# EAGLE board farmBot PCB3 v23 (EAGLE 9.7.0)
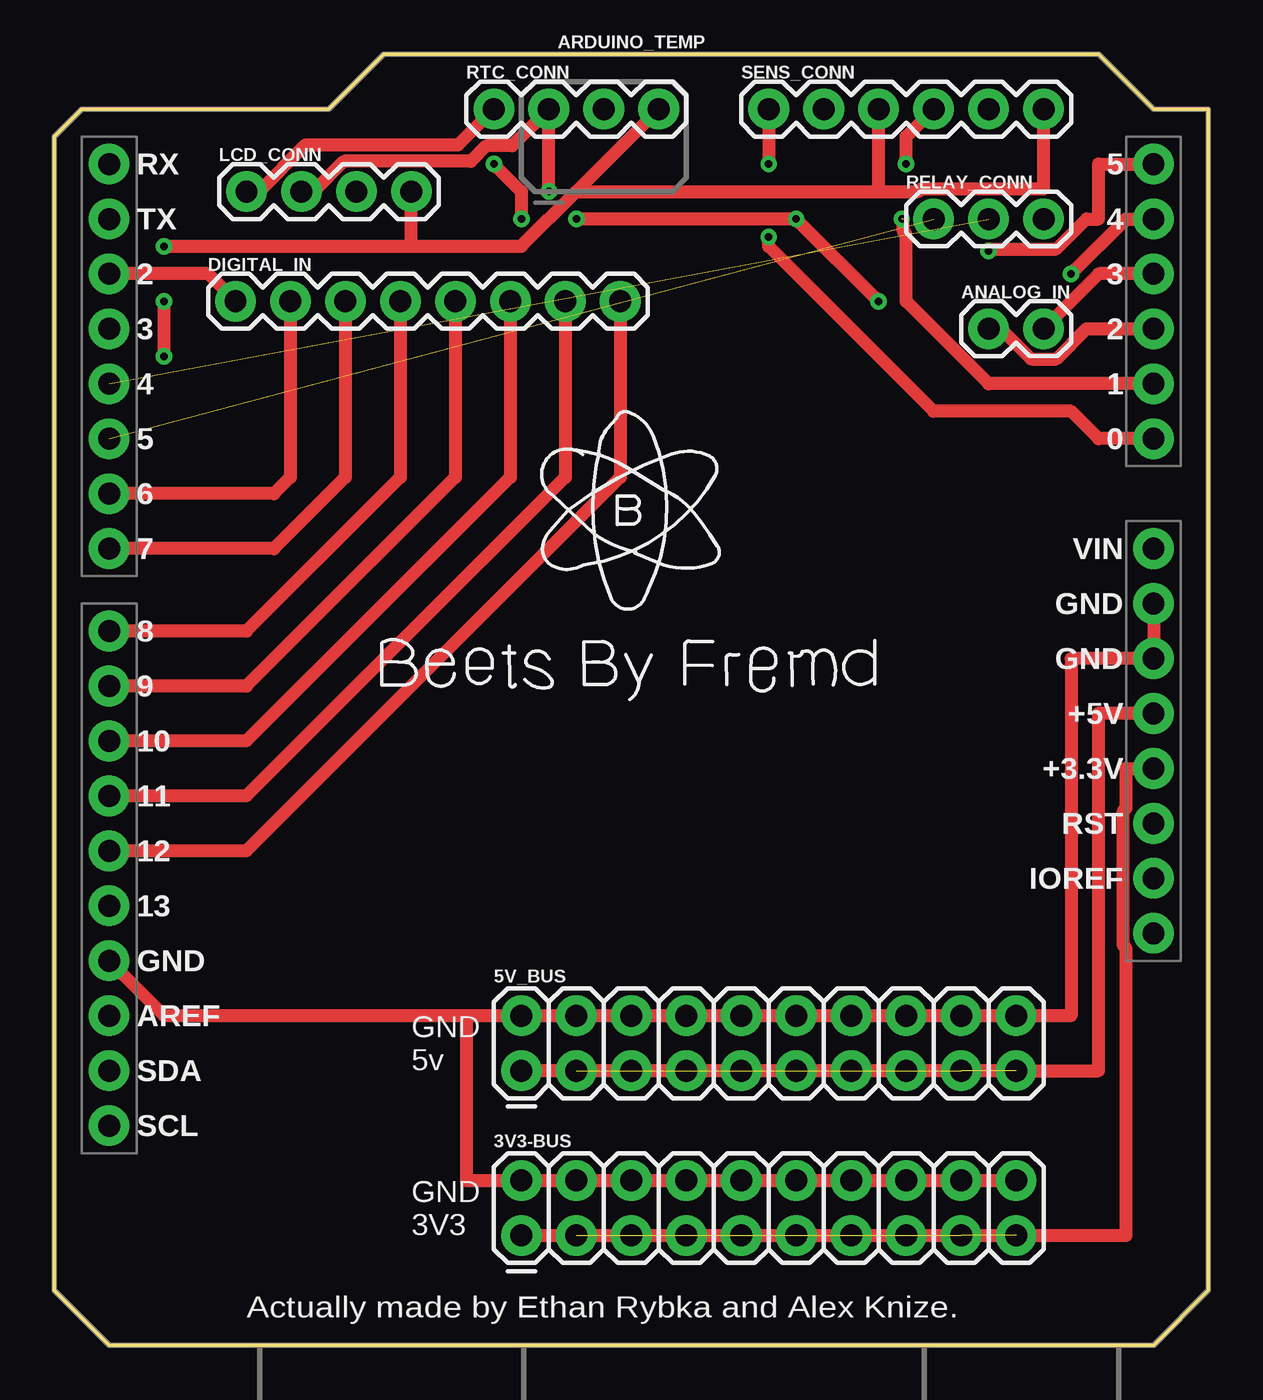
[diagram p0: board, top side]
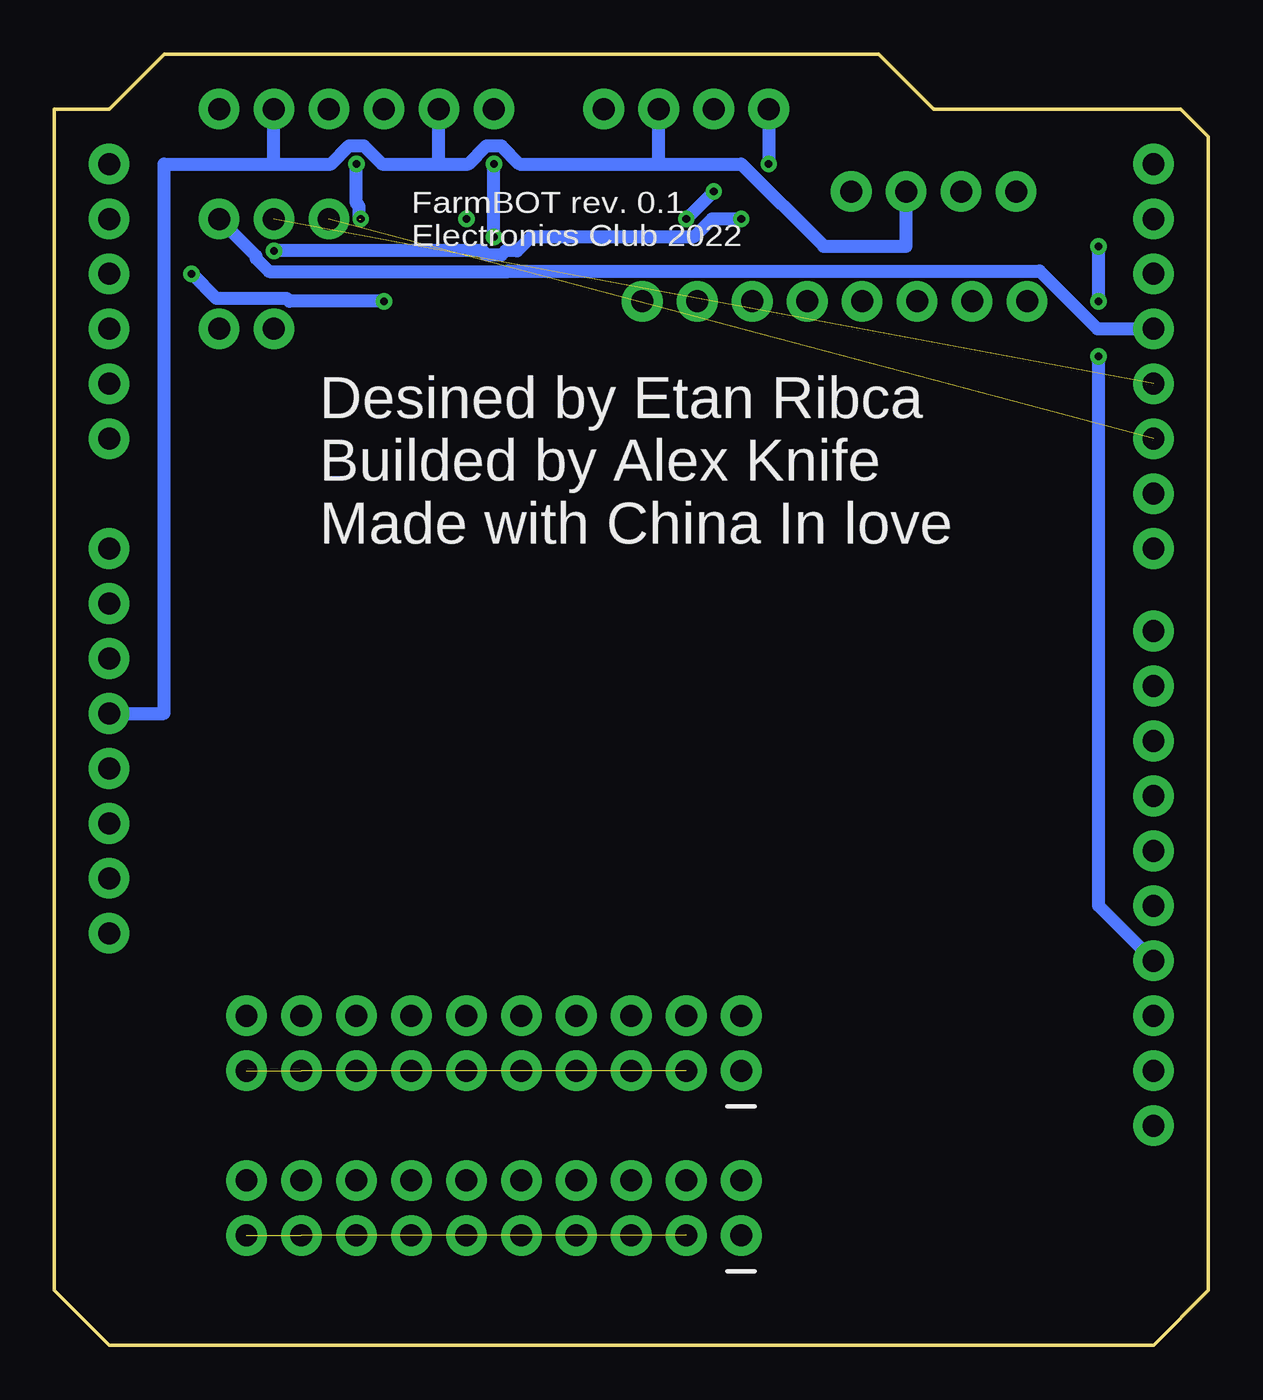
[diagram p1: board, bottom side, seen from below]

Size 53.34 x 59.69 mm. Coordinates in mm from the lower left corner, seen from the top.
Outline: 1.27,57.15 12.7,57.15 15.24,59.69 48.26,59.69 50.8,57.15 53.34,57.15 53.34,2.54 50.8,0 2.54,0 0,2.54 0,55.88 1.27,57.15
Copper layers (1*16): Top 0.035mm / dielectric 1.5mm / Bottom 0.035mm
Design rules "default": minimum track width 6mil, minimum drill 0.35mm, track to track 6mil, track to pad 6mil, pad to pad 6mil, via to via 6mil, smd to smd 6mil, copper to edge 40mil, drill to drill 6mil, minimum pad ring 10mil, minimum via ring 8mil, stop-mask expansion 4mil, vias tented up to drill 0mil, thermal gap 10mil

## Footprints (pad centres in the part's own frame; a part is rotated, then mirrored left to right if it is on the bottom)
2X10 = drill 1.016 pad 1.88: 1 0,0; 2 0,2.54; 3 2.54,0; 4 2.54,2.54; 5 5.08,0; 6 5.08,2.54; 7 7.62,0; 8 7.62,2.54; 9 10.16,0; 10 10.16,2.54; 11 12.7,0; 12 12.7,2.54; 13 15.24,0; 14 15.24,2.54; 15 17.78,0; 16 17.78,2.54; 17 20.32,0; 18 20.32,2.54; 19 22.86,0; 20 22.86,2.54
1X02 = drill 1.016 pad 1.88: 1 0,0; 2 2.54,0
UNO_R3_SHIELD = drill 1.016 pad 1.88: 3.3V 24.13,-2.54; 5V 24.13,0; A0 24.13,12.7; A1 24.13,15.24; A2 24.13,17.78; A3 24.13,20.32; A4 24.13,22.86; A5 24.13,25.4; AREF -24.13,-13.97; D2 -24.13,20.32; D3 -24.13,17.78; D4 -24.13,15.24; D5 -24.13,12.7; D6 -24.13,10.16; D7 -24.13,7.62; D8 -24.13,3.81; D9 -24.13,1.27; D10 -24.13,-1.27; D11 -24.13,-3.81; D12 -24.13,-6.35; D13 -24.13,-8.89; GND@0 24.13,2.54; GND@1 24.13,5.08; GND@2 -24.13,-11.43; IOREF 24.13,-7.62; NC 24.13,-10.16; RES 24.13,-5.08; RX -24.13,25.4; SCL -24.13,-19.05; SDA -24.13,-16.51; TX -24.13,22.86; VIN 24.13,7.62
1X08 = drill 1.016 pad 1.88: 1 0,0; 2 2.54,0; 3 5.08,0; 4 7.62,0; 5 10.16,0; 6 12.7,0; 7 15.24,0; 8 17.78,0
1X04 = drill 1.016 pad 1.88: 1 0,0; 2 2.54,0; 3 5.08,0; 4 7.62,0
1X03 = drill 1.016 pad 1.88: 1 0,0; 2 2.54,0; 3 5.08,0
1X06 = drill 1.016 pad 1.88: 1 0,0; 2 2.54,0; 3 5.08,0; 4 7.62,0; 5 10.16,0; 6 12.7,0

## Placement (x,y rotation side)
3V3-BUS  [2X10]  21.59,5.08 0 top
5V_BUS  [2X10]  21.59,12.7 0 top
ANALOG_IN  A2 A3  [1X02]  43.18,46.99 0 top
ARDUINO_TEMP  ARDUINO_UNO_R3_SHIELDBASIC  [UNO_R3_SHIELD]  26.67,29.21 0 top
DIGITAL_IN  2 6-12  [1X08]  8.38,48.26 0 top
LCD_CONN  SDL SDA 5V GND  [1X04]  8.89,53.34 0 top
RELAY_CONN  LIGHT PUMP  [1X03]  40.64,52.07 0 top
RTC_CONN  SDL SDA 5V GND  [1X04]  20.32,57.15 0 top
SENS_CONN  AIN 5V GND  [1X06]  33.02,57.15 0 top

## Library data of the parts
3V3-BUS 5V_BUS ANALOG_IN RELAY_CONN = SparkFun-Connectors
ARDUINO_TEMP = SparkFun-Boards
DIGITAL_IN = SparkFun-Connectors; PROD_ID: CONN-08438
LCD_CONN RTC_CONN = SparkFun-Connectors; PROD_ID: CONN-09696
SENS_CONN = SparkFun-Connectors; PROD_ID: CONN-08437

## Nets
3.3V: 3V3-BUS.1 3V3-BUS.3 3V3-BUS.5 3V3-BUS.7 3V3-BUS.9 3V3-BUS.11 3V3-BUS.13 3V3-BUS.15 3V3-BUS.17 3V3-BUS.19 ARDUINO_TEMP.3.3V
5V: 5V_BUS.1 5V_BUS.3 5V_BUS.5 5V_BUS.7 5V_BUS.9 5V_BUS.11 5V_BUS.13 5V_BUS.15 5V_BUS.17 5V_BUS.19 ARDUINO_TEMP.5V LCD_CONN.3 RTC_CONN.3 SENS_CONN.2 SENS_CONN.5
A0: ARDUINO_TEMP.A0 SENS_CONN.1
A1: ARDUINO_TEMP.A1 SENS_CONN.4
A2: ANALOG_IN.1 ARDUINO_TEMP.A2
A3: ANALOG_IN.2 ARDUINO_TEMP.A3
D2: ARDUINO_TEMP.D2 DIGITAL_IN.1
D6: ARDUINO_TEMP.D6 DIGITAL_IN.2
D7: ARDUINO_TEMP.D7 DIGITAL_IN.3
D8: ARDUINO_TEMP.D8 DIGITAL_IN.4
D9: ARDUINO_TEMP.D9 DIGITAL_IN.5
D10: ARDUINO_TEMP.D10 DIGITAL_IN.6
D11: ARDUINO_TEMP.D11 DIGITAL_IN.7
D12: ARDUINO_TEMP.D12 DIGITAL_IN.8
GND: 3V3-BUS.2 3V3-BUS.4 3V3-BUS.6 3V3-BUS.8 3V3-BUS.10 3V3-BUS.12 3V3-BUS.14 3V3-BUS.16 3V3-BUS.18 3V3-BUS.20 5V_BUS.2 5V_BUS.4 5V_BUS.6 5V_BUS.8 5V_BUS.10 5V_BUS.12 5V_BUS.14 5V_BUS.16 5V_BUS.18 5V_BUS.20 ARDUINO_TEMP.GND@0 ARDUINO_TEMP.GND@1 ARDUINO_TEMP.GND@2 LCD_CONN.4 RTC_CONN.4 SENS_CONN.3 SENS_CONN.6
LIGHT0: ARDUINO_TEMP.D4 RELAY_CONN.2
LIGHT1: ARDUINO_TEMP.D5 RELAY_CONN.1
PUMP: ARDUINO_TEMP.D3 RELAY_CONN.3
SDA: ARDUINO_TEMP.A4 LCD_CONN.2 RTC_CONN.2
SDL: ARDUINO_TEMP.A5 LCD_CONN.1 RTC_CONN.1

## Tracks (layer width: path | path; a pad name or v marks a point on that pad's centre or on a via)
3.3V  (8 unrouted)
  Top 0.61: ARDUINO_TEMP.3.3V 49.53,26.67 49.53,24.84 49.4,24.71 49.4,18.47 49.53,18.34 49.53,5.08 3V3-BUS.19 3V3-BUS.1
5V  (8 unrouted)
  Top 0.61: ARDUINO_TEMP.5V 48.26,29.21 48.26,12.7 5V_BUS.19 5V_BUS.1
  Bottom 0.61: ARDUINO_TEMP.5V 48.26,29.21 48.26,54.61 43.18,54.61 | 43.18,54.61 SENS_CONN.5 | 35.56,54.61 SENS_CONN.2 | 25.4,54.61 RTC_CONN.3 | 25.4,54.61 21.59,54.61 17.78,50.8 13.97,50.8 LCD_CONN.3 | 35.56,54.61 34.2,54.61 33.37,55.44 32.67,55.44 31.84,54.61 25.4,54.61 | 43.18,54.61 40.55,54.61 39.72,55.44 39.02,55.44 38.19,54.61 35.56,54.61
A0  (via drill 0.35)
  Top 0.61: ARDUINO_TEMP.A0 48.26,41.91 46.99,43.18 40.64,43.18 33.02,50.8 v33.02,51.23 | SENS_CONN.1 v33.02,54.61
  Bottom 0.61: v33.02,51.23 v33.02,54.61
A1  (via drill 0.35)  (1 unrouted)
  Top 0.61: ARDUINO_TEMP.A1 43.18,44.45 39.37,48.26 39.37,51.36 39.24,51.49 39.24,52.07 | v39.37,54.61 39.37,55.88 SENS_CONN.4
  Bottom 0.61: v39.17,52.07 39.24,52.14 39.24,52.65 39.37,52.78 v39.37,54.61
A2
  Top 0.61: ANALOG_IN.1 43.74,46.99 45.14,45.59 46.3,45.59 47.7,46.99 ARDUINO_TEMP.A2
A3
  Top 0.61: ANALOG_IN.2 48.26,49.53 ARDUINO_TEMP.A3
D2
  Top 0.61: DIGITAL_IN.1 7.11,49.53 ARDUINO_TEMP.D2
D6
  Top 0.61: DIGITAL_IN.2 10.92,40.13 10.16,39.37 ARDUINO_TEMP.D6
D7
  Top 0.61: DIGITAL_IN.3 13.46,40.13 10.16,36.83 ARDUINO_TEMP.D7
D8
  Top 0.61: DIGITAL_IN.4 16,40.13 8.89,33.02 ARDUINO_TEMP.D8
D9
  Top 0.61: DIGITAL_IN.5 18.54,40.13 8.89,30.48 ARDUINO_TEMP.D9
D10
  Top 0.61: DIGITAL_IN.6 21.08,40.13 8.89,27.94 ARDUINO_TEMP.D10
D11
  Top 0.61: DIGITAL_IN.7 23.62,40.13 8.89,25.4 ARDUINO_TEMP.D11
D12
  Top 0.61: DIGITAL_IN.8 26.16,40.13 8.89,22.86 ARDUINO_TEMP.D12
GND  (via drill 0.35)
  Top 0.61: 19.05,15.24 5V_BUS.2 5V_BUS.4 5V_BUS.6 5V_BUS.8 5V_BUS.10 5V_BUS.12 5V_BUS.14 5V_BUS.16 5V_BUS.18 5V_BUS.20 46.99,15.24 46.99,31.75 ARDUINO_TEMP.GND@0 ARDUINO_TEMP.GND@1 | 19.05,15.24 19.05,7.62 3V3-BUS.2 3V3-BUS.4 3V3-BUS.6 3V3-BUS.8 3V3-BUS.10 3V3-BUS.12 3V3-BUS.14 3V3-BUS.16 3V3-BUS.18 3V3-BUS.20 | 19.05,15.24 5.08,15.24 ARDUINO_TEMP.GND@2 | v5.08,45.72 v5.08,48.26 | v5.08,50.8 16.51,50.8 | 16.51,50.8 LCD_CONN.4 | 16.51,50.8 21.59,50.8 24.13,53.34 | 24.13,53.34 RTC_CONN.4 | 24.13,53.34 38.1,53.34 | 38.1,53.34 SENS_CONN.3 | 38.1,53.34 39.93,53.34 40.06,53.47 45.72,53.47 SENS_CONN.6
  Bottom 0.61: ARDUINO_TEMP.GND@2 5.08,20.32 v5.08,45.72 | v5.08,48.26 v5.08,50.8
LIGHT0  (1 unrouted)
LIGHT1  (1 unrouted)
PUMP
  Bottom 0.61: ARDUINO_TEMP.D3 5.14,46.99 7.8,49.66 32.34,49.66 32.36,49.64 43.4,49.64 44.02,50.25 44.02,50.36 RELAY_CONN.3
SDA  (via drill 0.35)
  Top 0.61: LCD_CONN.2 11.99,53.34 13.39,54.74 19.27,54.74 19.97,55.44 21.16,55.44 RTC_CONN.2 v22.86,53.34 | v46.99,49.53 49.53,52.07 ARDUINO_TEMP.A4 | v38.1,48.26 v34.29,52.07 v24.13,52.07
  Bottom 0.61: v24.13,52.07 v22.86,53.34 | v38.1,48.26 42.47,48.26 42.6,48.39 45.85,48.39 v46.99,49.53
SDL  (via drill 0.35)
  Top 0.61: RTC_CONN.1 18.67,55.5 11.61,55.5 9.45,53.34 LCD_CONN.1 | v20.32,54.61 21.59,53.34 v21.59,52.07 | v43.18,50.6 43.25,50.67 46.3,50.67 47.7,52.07 48.26,52.07 48.26,54.61 ARDUINO_TEMP.A5
  Bottom 0.61: RTC_CONN.1 v20.32,54.61 | v43.18,50.6 33.57,50.6 33.37,50.4 32.67,50.4 32.47,50.6 31.95,50.6 31.32,51.23 23.78,51.23 22.95,52.07 v21.59,52.07

## Text on the board
bPlace: Desined by Etan Ribca / Builded by Alex Knife / Made with China In love
tNames: GND / 5v | GND / 3V3 | Actually made by Ethan Rybka and Alex Knize.
bNames: FarmBOT rev. 0.1 / Electronics Club 2022
200bmp: C:/Users/rybka3106/Pictures/new logo.bmp